# Altium PCB HDR-TH_7P-P2.54-V_2021-01-11.pcbdoc
Units mm, origin at the board's own origin, x right, y up, seen from the top; angles counter-clockwise.
Board outline 46.1 x 28.35 mm, 2 copper layers (Top Layer, Bottom Layer); 1 components, 0 nets, 7 pads, 0 vias.
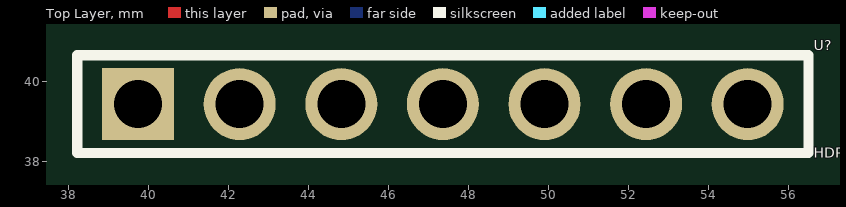
[diagram p0: Top Layer view]
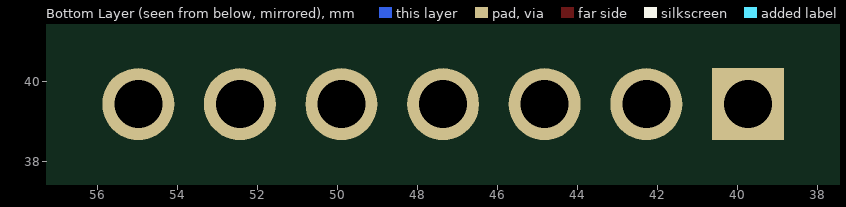
[diagram p1: Bottom Layer view, seen from below]

## Layer stack, top to bottom
Top Layer: signal copper (thickness not stored)
Dielectric: dielectric 0.32, FR-4, Dk 4.8
Bottom Layer: signal copper (thickness not stored)

## Board outline
71.497,25.4 25.4,25.4 25.4,53.748 71.497,53.748

## Components (designator, comment, footprint, x,y, rotation, side; value= is the part's Value field where it differs from the comment)
U? "HDR-TH_7P-P2.54-V" HDR-TH_7P-P2.54-V 47.369,39.447 r0 top

## Footprints (in the part's own frame and the unit in brackets; to place one, negate y for a bottom-side part, rotate by r counter-clockwise, add the part's x,y. Pads: shape width x height; smd on the part's side, far side on the other; paste and mask are expansions set on the pad)
HDR-TH_7P-P2.54-V [mm]
  rect 1.8x1.8 hole 1.2: 1(-7.622,0)
  round 1.8 hole 1.2: 2(-5.082,0) 3(-2.542,0) 4(-0.002,0) 5(2.538,0) 6(5.078,0) 7(7.618,0)
  silkscreen extent -9.14,-1.22 9.14,1.22

## Nets (pads, with @x,y where several pads share a name; then routed paths per layer and width w, separated by ;. In a path a pad name is that pad's centre, name@x,y a point inside that pad or via, vN(x,y) a via of type N, cw(c..) or ccw(c..) an arc to the next point about the centre after c; other vN are vias at no path point)
pads on no net: U?.1 U?.2 U?.3 U?.4 U?.5 U?.6 U?.7

## Silkscreen, mask and mechanical layers (free items; w line width, h text height)
Document:
  lines w0.003: 48.423,39.549 48.474,39.599